# Altium PCB BackBoard.PcbDoc
Units mm, origin at the board's own origin, x right, y up, seen from the top; angles counter-clockwise.
Board outline 426 x 129 mm, 2 copper layers (Top Layer, Bottom Layer); 16 components, 23 nets, 1222 pads, 187 vias.
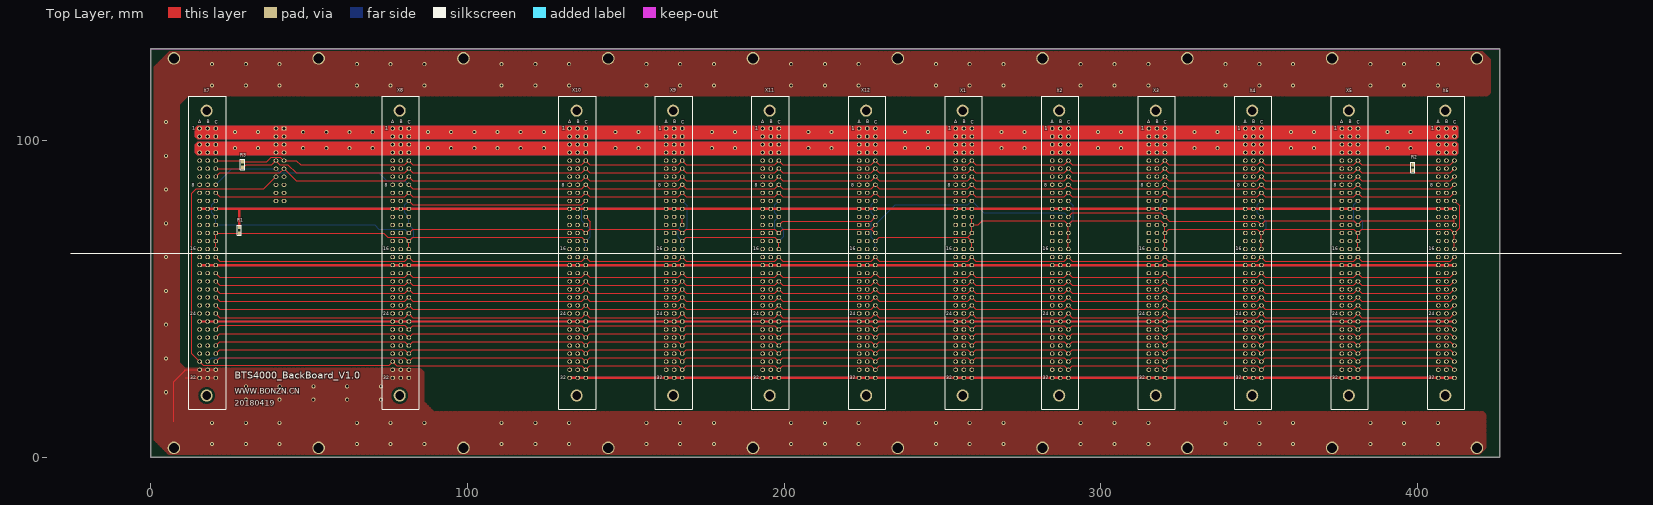
[diagram p0: Top Layer view]
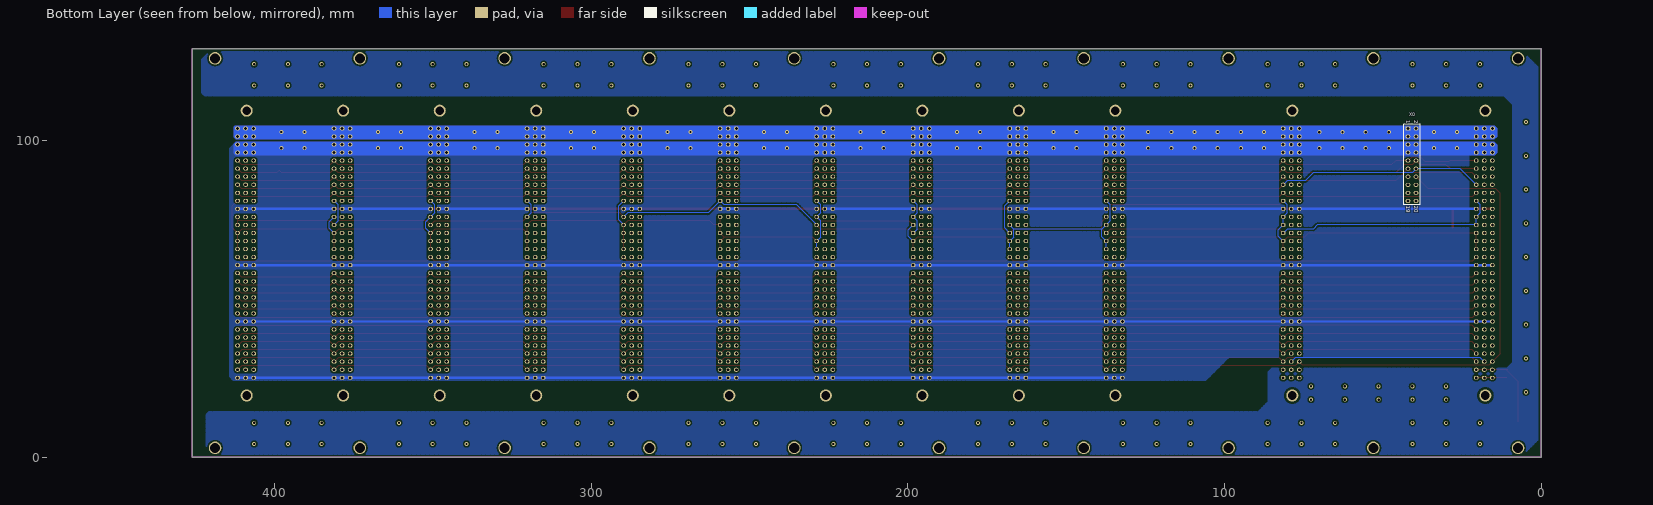
[diagram p1: Bottom Layer view, seen from below]
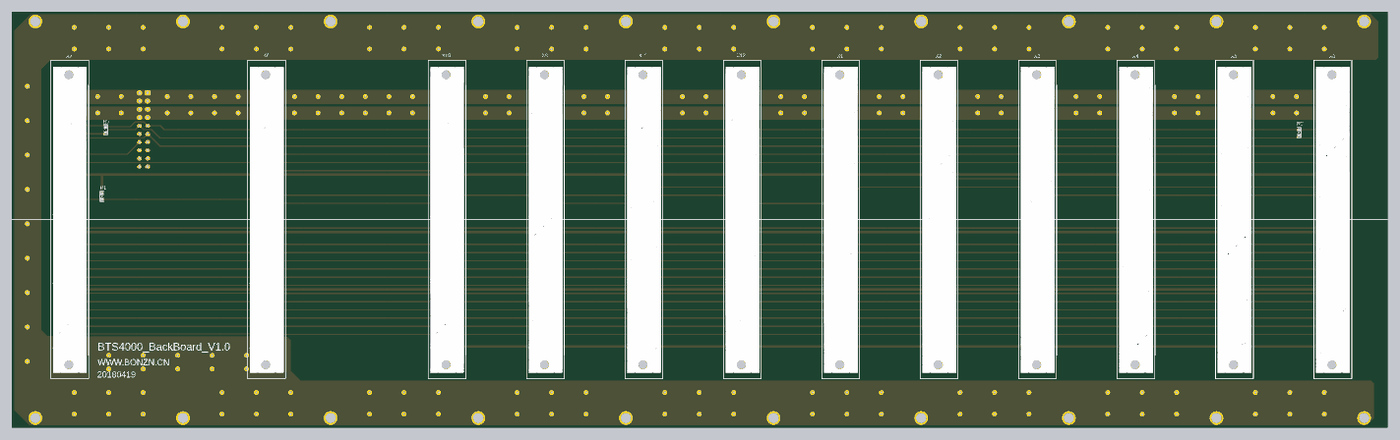
[diagram p2: 3D render of the assembled board from above, using the file's embedded part models]

## Layer stack, top to bottom
Top Layer: signal copper 0.0356
Dielectric: dielectric 0.32, FR-4, Dk 4.8
Bottom Layer: signal copper 0.0356

## Board outline
0,0 0,129 426,129 426,0

## Design rules (kind name [scope] priority, off if disabled: settings)
Clearance Clearance_1 [InPolygon] p1: gap=0.508
Clearance [All] p2: gap=0.305
HoleSize [All] p1: absolutevalues=TRUE maxlimit=254 minlimit=0.025 maxpercent=80.000 minpercent=20.000
PolygonConnect [All] p1: connectstyle=Direct reliefconductorwidth=0.254 reliefentries=4 polygonreliefangle="90 Angle" airgapwidth=0.254
RoomDefinition BackBoard [InComponentClass('BackBoard')] p1: confinementstyle=ConfineIn formatcopy=TRUE lockcomponents=FALSE outline -4.826,-8.031 433.959,-8.031 433.959,133.193 -4.826,133.193
RoutingVias [All] p1: holewidth=0.711 width=1.27 viastyle="Through Hole" minholewidth=0.711 minwidth=1.27 maxholewidth=0.711 maxwidth=1.27
SolderMaskExpansion [All] p1: expansion=0.102
Width [All] p1: maxlimit=254 minlimit=0.254 preferedwidth=0.381 minimp=50.000000 maximp=50.000000 favimp=50.000000
27 further rules are at their usual default settings.

## Components (designator, comment, footprint, x,y, rotation, side; value= is the part's Value field where it differs from the comment)
R1 "Res1" 0603_XF 27.94,71.725 r90 top
R2 "Res1" 0603_XF 398.526,91.537 r270 top
R3 "Res1" 0603_XF 28.956,92.465 r90 top
X0 "Header 10X2" HDR2X10 42.037,103.856 r270 bottom
X1 "CNVME96" CONNECT_96_Female 254.16,103.87 r0 top locked
X2 "CNVME96" CONNECT_96_Female 284.64,103.87 r0 top locked
X3 "CNVME96" CONNECT_96_Female 315.12,103.87 r0 top locked
X4 "CNVME96" CONNECT_96_Female 345.6,103.87 r0 top locked
X5 "CNVME96" CONNECT_96_Female 376.08,103.87 r0 top locked
X6 "CNVME96" CONNECT_96_Female 406.56,103.87 r0 top locked
X7 "CNVME96" CONNECT_96_Female 15.4,103.87 r0 top locked
X8 "CNVME96" CONNECT_96_Female 76.36,103.87 r0 top locked
X9 "CNVME96" CONNECT_96_Female 162.72,103.87 r0 top locked
X10 "CNVME96" CONNECT_96_Female 132.24,103.87 r0 top locked
X11 "CNVME96" CONNECT_96_Female 193.2,103.87 r0 top locked
X12 "CNVME96" CONNECT_96_Female 223.68,103.87 r0 top locked

## Footprints (in the part's own frame and the unit in brackets; to place one, negate y for a bottom-side part, rotate by r counter-clockwise, add the part's x,y. Pads: shape width x height; smd on the part's side, far side on the other; paste and mask are expansions set on the pad)
0603_XF [mm]
  rect 1.1x1 smd: 1(-0.889,0) 2(0.889,0)
  silkscreen extent -1.6,-0.66 1.6,0.66, body extent -0.85,-0.4 0.85,0.4, height 0.56
CONNECT_96_Female [mil]
  round 150 hole 106.3: 0(86.61,-3320.47) 0(86.61,220.47)
  oct 60x50 hole 37: A1(0,0)
  oval 60x50 hole 37: A2(0,-100) A3(0,-200) A4(0,-300) A5(0,-400) A6(0,-500) A7(0,-600) A8(0,-700) A9(0,-800) A10(0,-900) A11(0,-1000) A12(0,-1100) A13(0,-1200) A14(0,-1300) A15(0,-1400) A16(0,-1500) A17(0,-1600) A18(0,-1700) A19(0,-1800) A20(0,-1900) A21(0,-2000) A22(0,-2100) A23(0,-2200) A24(0,-2300) A25(0,-2400) A26(0,-2500) A27(0,-2600) A28(0,-2700) A29(0,-2800) A30(0,-2900) A31(0,-3000) A32(0,-3100) B1(100,0) B2(100,-100) B3(100,-200) B4(100,-300) B5(100,-400) B6(100,-500) B7(100,-600) B8(100,-700) B9(100,-800) B10(100,-900) B11(100,-1000) B12(100,-1100) B13(100,-1200) B14(100,-1300) B15(100,-1400) B16(100,-1500) B17(100,-1600) B18(100,-1700) B19(100,-1800) B20(100,-1900) B21(100,-2000) B22(100,-2100) B23(100,-2200) B24(100,-2300) B25(100,-2400) B26(100,-2500) B27(100,-2600) B28(100,-2700) B29(100,-2800) B30(100,-2900) B31(100,-3000) B32(100,-3100) C1(200,0) C2(200,-100) C3(200,-200) C4(200,-300) C5(200,-400) C6(200,-500) C7(200,-600) C8(200,-700) C9(200,-800) C10(200,-900) C11(200,-1000) C12(200,-1100) C13(200,-1200) C14(200,-1300) C15(200,-1400) C16(200,-1500) C17(200,-1600) C18(200,-1700) C19(200,-1800) C20(200,-1900) C21(200,-2000) C22(200,-2100) C23(200,-2200) C24(200,-2300) C25(200,-2400) C26(200,-2500) C27(200,-2600) C28(200,-2700) C29(200,-2800) C30(200,-2900) C31(200,-3000) C32(200,-3100)
  silkscreen extent -133,-3493 329,400, body extent -107,-3420 307,320, height 457
HDR2X10 [mm] "Connector; Header; 10x2 Position"
  rect 1.27x1.5 hole 0.9: 1(0,0)
  oval 1.27x1.5 hole 0.9: 2(0,2.54) 3(2.54,0) 4(2.54,2.54) 5(5.08,0) 6(5.08,2.54) 7(7.62,0) 8(7.62,2.54) 9(10.16,0) 10(10.16,2.54) 11(12.7,0) 12(12.7,2.54) 13(15.24,0) 14(15.24,2.54) 15(17.78,0) 16(17.78,2.54) 17(20.32,0) 18(20.32,2.54) 19(22.86,0) 20(22.86,2.54)
  silkscreen extent -1.27,-1.27 24.13,3.81

## Part data
R1 R2 R3: "Resistor"
X0: "Header, 10-Pin, Dual row"
X1 X2 X3 X4 X5 X6 X7 X8 X9 X10 X11 X12: "96-Pin Connector (3x32 2.54mm grid)"

## Free pads (board coordinates)
  round 4 hole 3.2: 0(7.26,3) 0(7.26,126) 0(52.98,3) 0(52.98,126) 0(98.7,3) 0(98.7,126) 0(144.42,3) 0(144.42,126) 0(190.14,3) 0(190.14,126) 0(235.86,3) 0(235.86,126) 0(281.58,3) 0(281.58,126) 0(327.3,3) 0(327.3,126) 0(373.02,3) 0(373.02,126) 0(418.74,3) 0(418.74,126)

## Via types
v1: diameter 1.27, hole 0.711, Top Layer to Bottom Layer, 187 vias

## Nets (pads, with @x,y where several pads share a name; then routed paths per layer and width w, separated by ;. In a path a pad name is that pad's centre, name@x,y a point inside that pad or via, vN(x,y) a via of type N, cw(c..) or ccw(c..) an arc to the next point about the centre after c; other vN are vias at no path point)
+5: X0.1 X0.2 X0.3 X0.4 X1.A1 X1.A2 X1.B1 X1.B2 X1.C1 X1.C2 X2.A1 X2.A2 X2.B1 X2.B2 X2.C1 X2.C2 X3.A1 X3.A2 X3.B1 X3.B2 X3.C1 X3.C2 X4.A1 X4.A2 X4.B1 X4.B2 X4.C1 X4.C2 X5.A1 X5.A2 X5.B1 X5.B2 X5.C1 X5.C2 X6.A1 X6.A2 X6.B1 X6.B2 X6.C1 X6.C2 X7.A1 X7.A2 X7.B1 X7.B2 X7.C1 X7.C2 X8.A1 X8.A2 X8.B1 X8.B2 X8.C1 X8.C2 X9.A1 X9.A2 X9.B1 X9.B2 X9.C1 X9.C2 X10.A1 X10.A2 X10.B1 X10.B2 X10.C1 X10.C2 X11.A1 X11.A2 X11.B1 X11.B2 X11.C1 X11.C2 X12.A1 X12.A2 X12.B1 X12.B2 X12.C1 X12.C2
  other v1: 48.1,102.699 55.415,102.699 62.73,102.699 70.046,102.699 26.543,102.713 33.858,102.713 87.503,102.713 94.818,102.713 102.133,102.713 109.449,102.713 116.764,102.713 124.079,102.713 146.66,102.713 153.975,102.713 177.14,102.713 184.455,102.713 207.62,102.713 214.935,102.713 238.1,102.713 245.415,102.713 268.58,102.713 275.895,102.713 299.06,102.713 306.375,102.713 329.54,102.713 336.855,102.713 360.02,102.713 367.335,102.713 390.5,102.713 397.815,102.713
CAN_H: R2.1 R3.2 X0.9 X1.C5 X2.C5 X3.C5 X4.C5 X5.C5 X6.C5 X7.C5 X8.C5 X9.C5 X10.C5 X11.C5 X12.C5 | length 404.1
  Top Layer w0.381: X7.C5 28.688,93.71 R3.2@28.956,93.442 ; R3.2 36.585,93.354 38.07,94.839 40.894,94.839 X0.9 45.974,93.696 47.244,92.426 80.156,92.426 X8.C5 82.724,92.426 136.036,92.426 X10.C5 138.604,92.426 166.516,92.426 X9.C5 169.084,92.426 196.996,92.426 X11.C5 199.564,92.426 227.476,92.426 X12.C5 230.044,92.426 257.956,92.426 X1.C5 260.524,92.426 288.436,92.426 X2.C5 291.004,92.426 318.916,92.426 X3.C5 321.484,92.426 349.396,92.426 X4.C5 351.964,92.426 379.876,92.426 X5.C5 382.444,92.426 410.356,92.426 X6.C5
CAN_L: R2.2 R3.1 X0.10 X1.C6 X2.C6 X3.C6 X4.C6 X5.C6 X6.C6 X7.C6 X8.C6 X9.C6 X10.C6 X11.C6 X12.C6 | length 405.6
  Top Layer w0.381: X7.C6 28.589,91.17 28.956,91.537 29.21,91.537 30.099,92.426 38.227,92.426 X0.10 40.728,92.465 43.268,92.465 45.847,89.886 80.156,89.886 X8.C6 82.724,89.886 136.036,89.886 X10.C6 138.604,89.886 166.516,89.886 X9.C6 169.084,89.886 196.996,89.886 X11.C6 199.564,89.886 227.476,89.886 X12.C6 230.044,89.886 257.956,89.886 X1.C6 260.524,89.886 288.436,89.886 X2.C6 291.004,89.886 318.916,89.886 X3.C6 321.484,89.886 349.396,89.886 X4.C6 351.964,89.886 379.876,89.886 X5.C6 382.444,89.886 397.764,89.886 R2.2 399.288,89.886 410.356,89.886 X6.C6
E1_PPS: X1.C30 X2.C30 X3.C30 X4.C30 X5.C30 X6.C30 X7.C30 X8.C30 X9.C30 X10.C30 X11.C30 X12.C30 | length 402.6
  Top Layer w0.381: X7.C30 21.736,31.466 80.184,31.466 X8.C30 82.696,31.466 136.064,31.466 X10.C30 138.576,31.466 166.544,31.466 X9.C30 169.056,31.466 197.024,31.466 X11.C30 199.536,31.466 227.504,31.466 X12.C30 230.016,31.466 257.984,31.466 X1.C30 260.496,31.466 288.464,31.466 X2.C30 290.976,31.466 318.944,31.466 X3.C30 321.456,31.466 349.424,31.466 X4.C30 351.936,31.466 379.904,31.466 X5.C30 382.416,31.466 410.384,31.466 X6.C30
Freq10M: X1.C9 X2.C9 X3.C9 X4.C9 X5.C9 X6.C9 X7.C9 X8.C9 X9.C9 X10.C9 X11.C9 X12.C9 | length 402.9
  Top Layer w0.381: X7.C9 21.764,82.266 80.156,82.266 X8.C9 82.724,82.266 136.036,82.266 X10.C9 138.604,82.266 166.516,82.266 X9.C9 169.084,82.266 196.996,82.266 X11.C9 199.564,82.266 227.476,82.266 X12.C9 230.044,82.266 257.956,82.266 X1.C9 260.524,82.266 288.436,82.266 X2.C9 291.004,82.266 318.916,82.266 X3.C9 321.484,82.266 349.396,82.266 X4.C9 351.964,82.266 379.876,82.266 X5.C9 382.444,82.266 410.356,82.266 X6.C9
GND: R1.2 X0.5 X0.6 X0.7 X0.8 X1.A3 X1.A4 X1.A11 X1.A18 X1.A25 X1.A32 X1.B3 X1.B4 X1.B11 X1.B18 X1.B25 X1.B32 X1.C3 X1.C4 X1.C11 X1.C18 X1.C25 X1.C32 X2.A3 X2.A4 X2.A11 X2.A18 X2.A25 X2.A32 X2.B3 X2.B4 X2.B11 X2.B18 X2.B25 X2.B32 X2.C3 X2.C4 X2.C11 X2.C18 X2.C25 X2.C32 X3.A3 X3.A4 X3.A11 X3.A18 X3.A25 X3.A32 X3.B3 X3.B4 X3.B11 X3.B18 X3.B25 X3.B32 X3.C3 X3.C4 X3.C11 X3.C18 X3.C25 X3.C32 X4.A3 X4.A4 X4.A11 X4.A18 X4.A25 X4.A32 X4.B3 X4.B4 X4.B11 X4.B18 X4.B25 X4.B32 X4.C3 X4.C4 X4.C11 X4.C18 X4.C25 X4.C32 X5.A3 X5.A4 X5.A11 X5.A18 X5.A25 X5.A32 X5.B3 X5.B4 X5.B11 X5.B18 X5.B25 X5.B32 X5.C3 X5.C4 X5.C11 X5.C18 X5.C25 X5.C32 X6.A3 X6.A4 X6.A11 X6.A18 X6.A25 X6.A32 X6.B3 X6.B4 X6.B11 X6.B18 X6.B25 X6.B32 X6.C3 X6.C4 X6.C11 X6.C18 X6.C25 X6.C32 X7.A3 X7.A4 X7.A11 X7.A18 X7.A25 X7.B3 X7.B4 X7.B11 X7.B18 X7.B25 X7.B30 X7.C3 X7.C4 X7.C11 X7.C18 X7.C25 X8.A3 X8.A4 X8.A11 X8.A18 X8.A25 X8.B3 X8.B4 X8.B11 X8.B18 X8.B25 X8.B30 X8.C3 X8.C4 X8.C11 X8.C18 X8.C25 X9.A3 X9.A4 X9.A11 X9.A18 X9.A25 X9.A32 X9.B3 X9.B4 X9.B11 X9.B18 X9.B25 X9.B32 X9.C3 X9.C4 X9.C11 X9.C18 X9.C25 X9.C32 X10.A3 X10.A4 X10.A11 X10.A18 X10.A25 X10.A32 X10.B3 X10.B4 X10.B11 X10.B18 X10.B25 X10.B32 X10.C3 X10.C4 X10.C11 X10.C18 X10.C25 X10.C32 X11.A3 X11.A4 X11.A11 X11.A18 X11.A25 X11.A32 X11.B3 X11.B4 X11.B11 X11.B18 X11.B25 X11.B32 X11.C3 X11.C4 X11.C11 X11.C18 X11.C25 X11.C32 X12.A3 X12.A4 X12.A11 X12.A18 X12.A25 X12.A32 X12.B3 X12.B4 X12.B11 X12.B18 X12.B25 X12.B32 X12.C3 X12.C4 X12.C11 X12.C18 X12.C25 X12.C32 | length 2877.1
  Top Layer w0.762: X7.A25 X7.B25 X7.C25 X8.A25 X8.B25 X8.C25 X10.A25 X10.B25 X10.C25 X9.A25 X9.B25 X9.C25 X11.A25 X11.B25 X11.C25 X12.A25 X12.B25 X12.C25 X1.A25 X1.B25 X1.C25 X2.A25 X2.B25 X2.C25 X3.A25 X3.B25 X3.C25 X4.A25 X4.B25 X4.C25 X5.A25 X5.B25 X5.C25 X6.A25 X6.B25 X6.C25 ; X7.A18 X7.B18 X7.C18 X8.A18 X8.B18 X8.C18 X10.A18 X10.B18 X10.C18 X9.A18 X9.B18 X9.C18 X11.A18 X11.B18 X11.C18 X12.A18 X12.B18 X12.C18 X1.A18 X1.B18 X1.C18 X2.A18 X2.B18 X2.C18 X3.A18 X3.B18 X3.C18 X4.A18 X4.B18 X4.C18 X5.A18 X5.B18 X5.C18 X6.A18 X6.B18 X6.C18 ; X7.A11 X7.B11 X7.C11 27.94,78.47 ; R1.2 27.94,78.47 ; X10.A32 X10.B32 X10.C32 X9.A32 X9.B32 X9.C32 X11.A32 X11.B32 X11.C32 X12.A32 X12.B32 X12.C32 X1.A32 X1.B32 X1.C32 X2.A32 X2.B32 X2.C32 X3.A32 X3.B32 X3.C32 X4.A32 X4.B32 X4.C32 X5.A32 X5.B32 X5.C32 X6.A32 X6.B32 X6.C32 ; X6.C11 X6.B11 X6.A11 X5.C11 X5.B11 X5.A11 X4.C11 X4.B11 X4.A11 X3.C11 X3.B11 X3.A11 X2.C11 X2.B11 X2.A11 X1.C11 X1.B11 X1.A11 X12.C11 X12.B11 X12.A11 X11.C11 X11.B11 X11.A11 X9.C11 X9.B11 X9.A11 X10.C11 X10.B11 X10.A11 X8.C11 X8.B11 X8.A11 27.94,78.47
  Bottom Layer w0.381: X7.B30 19.171,31.441 77.669,31.441 X8.B30
  Bottom Layer w0.762: X7.A25 X7.B25 X7.C25 X8.A25 X8.B25 X8.C25 X10.A25 X10.B25 X10.C25 X9.A25 X9.B25 X9.C25 X11.A25 X11.B25 X11.C25 X12.A25 X12.B25 X12.C25 X1.A25 X1.B25 X1.C25 X2.A25 X2.B25 X2.C25 X3.A25 X3.B25 X3.C25 X4.A25 X4.B25 X4.C25 X5.A25 X5.B25 X5.C25 X6.A25 X6.B25 X6.C25 ; X7.A18 X7.B18 X7.C18 X8.A18 X8.B18 X8.C18 X10.A18 X10.B18 X10.C18 X9.A18 X9.B18 X9.C18 X11.A18 X11.B18 X11.C18 X12.A18 X12.B18 X12.C18 X1.A18 X1.B18 X1.C18 X2.A18 X2.B18 X2.C18 X3.A18 X3.B18 X3.C18 X4.A18 X4.B18 X4.C18 X5.A18 X5.B18 X5.C18 X6.A18 X6.B18 X6.C18 ; X7.C11 X8.A11 X8.B11 ; X8.C11 X10.A11 X10.B11 ; X10.A32 X10.B32 X10.C32 X9.A32 X9.B32 X9.C32 X11.A32 X11.B32 X11.C32 X12.A32 X12.B32 X12.C32 X1.A32 X1.B32 X1.C32 X2.A32 X2.B32 X2.C32 X3.A32 X3.B32 X3.C32 X4.A32 X4.B32 X4.C32 X5.A32 X5.B32 X5.C32 X6.A32 X6.B32 X6.C32 ; X10.C11 X9.A11 X9.B11 ; X11.A11 X11.B11 ; X11.C11 X12.A11 X12.B11 ; X1.A11 X1.B11 X1.C11 ; X2.A11 X2.B11 X2.C11 ; X3.A11 X3.B11 ; X3.C11 X4.A11 X4.B11 ; X4.C11 X5.A11 X5.B11 ; X5.C11 X6.A11 X6.B11 X6.C11
  other v1: 48.1,97.619 55.415,97.619 62.73,97.619 70.046,97.619 26.543,97.633 33.858,97.633 87.503,97.633 94.818,97.633 102.133,97.633 109.449,97.633 116.764,97.633 124.079,97.633 146.66,97.633 153.975,97.633 177.14,97.633 184.455,97.633 207.62,97.633 214.935,97.633 238.1,97.633 245.415,97.633 268.58,97.633 275.895,97.633 299.06,97.633 306.375,97.633 329.54,97.633 336.855,97.633 360.02,97.633 367.335,97.633 390.5,97.633 397.815,97.633
H: X1.C10 X2.C12 X3.C10 X3.C12 X4.C13 X5.C10 X5.C13 X6.C12 X6.C13 X7.C10 X7.C12 X7.C13 X8.C14 X9.C10 X9.C14 X10.C12 X10.C14 X11.C10 X11.C12 X11.C14 X12.C13 X12.C14 | length 461.3
  Top Layer w0.381: X8.C14 82.696,72.106 136.064,72.106 X10.C14 138.576,72.106 138.811,72.106 ; X10.C12 138.811,74.439 138.811,72.106 ; X12.C14 227.504,72.106 ; X12.C13@228.76,73.362 227.504,72.106 ; X2.C12 290.976,77.186 318.944,77.186 X3.C12 321.533,74.597 349.473,74.597 X4.C13 351.936,74.646 379.904,74.646 X5.C13 382.416,74.646 411.64,74.646 ; X6.C13 411.64,74.646 ; X6.C12 411.64,74.646 ; 138.811,72.106 166.544,72.106 X9.C14 169.056,72.106 197.024,72.106 X11.C14 199.536,72.106 227.504,72.106
  Bottom Layer w0.381: X7.C10 19.202,79.732 19.202,77.208 X7.C12 X7.C13 70.725,73.39 72.009,72.106 80.184,72.106 X8.C14 ; X9.C14 169.418,72.468 169.418,79.392 X9.C10 ; X11.C14 197.023,72.107 197.023,74.673 X11.C12 197.023,77.187 197.023,79.753 X11.C10 ; X12.C13 235.096,79.726 257.956,79.726 X1.C10 263.064,77.186 288.464,77.186 X2.C12 ; X3.C12 318.93,77.2 318.93,79.74 X3.C10 ; X5.C13 379.89,74.66 379.89,79.74 X5.C10
IRIG-B-OUT0: X1.C17 X2.C17 X3.C17 X4.C17 X5.C17 X6.C17 X7.C17 X8.C17 X9.C17 X10.C17 X11.C17 X12.C17 | length 402.9
  Top Layer w0.381: X7.C17 21.764,61.946 80.156,61.946 X8.C17 82.724,61.946 136.036,61.946 X10.C17 138.604,61.946 166.516,61.946 X9.C17 169.084,61.946 196.996,61.946 X11.C17 199.564,61.946 227.476,61.946 X12.C17 230.044,61.946 257.956,61.946 X1.C17 260.524,61.946 288.436,61.946 X2.C17 291.004,61.946 318.916,61.946 X3.C17 321.484,61.946 349.396,61.946 X4.C17 351.964,61.946 379.876,61.946 X5.C17 382.444,61.946 410.356,61.946 X6.C17
IRIG-B-OUT1: X1.C19 X2.C19 X3.C19 X4.C19 X5.C19 X6.C19 X7.C19 X8.C19 X9.C19 X10.C19 X11.C19 X12.C19 | length 402.9
  Top Layer w0.381: X7.C19 21.764,56.866 80.156,56.866 X8.C19 82.724,56.866 136.036,56.866 X10.C19 138.604,56.866 166.516,56.866 X9.C19 169.084,56.866 196.996,56.866 X11.C19 199.564,56.866 227.476,56.866 X12.C19 230.044,56.866 257.956,56.866 X1.C19 260.524,56.866 288.436,56.866 X2.C19 291.004,56.866 318.916,56.866 X3.C19 321.484,56.866 349.396,56.866 X4.C19 351.964,56.866 379.876,56.866 X5.C19 382.444,56.866 410.356,56.866 X6.C19
IRIG-B-OUT2: X1.C20 X2.C20 X3.C20 X4.C20 X5.C20 X6.C20 X7.C20 X8.C20 X9.C20 X10.C20 X11.C20 X12.C20 | length 402.9
  Top Layer w0.381: X7.C20 21.764,54.326 80.156,54.326 X8.C20 82.724,54.326 136.036,54.326 X10.C20 138.604,54.326 166.516,54.326 X9.C20 169.084,54.326 196.996,54.326 X11.C20 199.564,54.326 227.476,54.326 X12.C20 230.044,54.326 257.956,54.326 X1.C20 260.524,54.326 288.436,54.326 X2.C20 291.004,54.326 318.916,54.326 X3.C20 321.484,54.326 349.396,54.326 X4.C20 351.964,54.326 379.876,54.326 X5.C20 382.444,54.326 410.356,54.326 X6.C20
IRIG-B-OUT3: X1.C21 X2.C21 X3.C21 X4.C21 X5.C21 X6.C21 X7.C21 X8.C21 X9.C21 X10.C21 X11.C21 X12.C21 | length 402.9
  Top Layer w0.381: X7.C21 21.764,51.786 80.156,51.786 X8.C21 82.724,51.786 136.036,51.786 X10.C21 138.604,51.786 166.516,51.786 X9.C21 169.084,51.786 196.996,51.786 X11.C21 199.564,51.786 227.476,51.786 X12.C21 230.044,51.786 257.956,51.786 X1.C21 260.524,51.786 288.436,51.786 X2.C21 291.004,51.786 318.916,51.786 X3.C21 321.484,51.786 349.396,51.786 X4.C21 351.964,51.786 379.876,51.786 X5.C21 382.444,51.786 410.356,51.786 X6.C21
L: R1.1 X1.C12 X1.C13 X1.C14 X1.C15 X1.C16 X2.C10 X2.C13 X2.C14 X2.C15 X2.C16 X3.C13 X3.C14 X3.C15 X3.C16 X4.C10 X4.C12 X4.C14 X4.C15 X4.C16 X5.C12 X5.C14 X5.C15 X5.C16 X6.C10 X6.C14 X6.C15 X6.C16 X7.C14 X7.C15 X7.C16 X8.C10 X8.C12 X8.C13 X8.C15 X8.C16 X9.C12 X9.C13 X9.C15 X9.C16 X10.C10 X10.C13 X10.C15 X10.C16 X11.C13 X11.C15 X11.C16 X12.C10 X12.C12 X12.C15 X12.C16 | length 612.4
  Top Layer w0.381: X7.C16 X7.C15 X7.C14 R1.1@27.926,70.85 ; R1.1 73.533,70.836 74.803,69.566 80.184,69.566 X8.C15 ; X8.C16 X8.C15 ; X8.C10 82.724,79.726 136.036,79.726 X10.C10 ; X10.C15 136.064,69.566 82.696,69.566 X8.C15 ; X9.C15 169.056,69.566 197.024,69.566 X11.C15 X11.C16 ; X9.C13 X9.C12 ; X11.C13 199.486,74.597 227.426,74.597 X12.C12 ; X12.C15 229.966,69.517 257.906,69.517 ; X1.C15@259.113,68.31 257.906,69.517 ; X1.C16 X1.C15 ; X1.C12 X1.C13 ; X2.C16 X2.C15 X2.C14 X2.C13 ; X3.C16 X3.C15 X3.C14 ; X4.C16 X4.C15 X4.C14 ; X5.C16 X5.C15 X5.C14 ; X6.C16 X6.C15 X6.C14 ; X6.C10 413.258,79.392 413.258,72.468 X6.C14 ; 257.906,69.517 X1.C14 X1.C13 ; X1.C13 261.253,73.39 262.509,74.646 288.464,74.646 X2.C13 ; X2.C13 290.976,74.646 318.944,74.646 X3.C13 X3.C14 ; X3.C14 321.456,72.106 349.424,72.106 X4.C14 ; X4.C14 351.936,72.106 379.904,72.106 X5.C14 ; X5.C14 382.416,72.106 410.384,72.106 X6.C14
  Bottom Layer w0.381: X8.C15 82.947,69.817 82.947,71.883 X8.C13 X8.C12 80.17,77.2 80.17,79.74 X8.C10 ; X10.C16 X10.C15 138.684,69.674 138.684,72.026 X10.C13 136.05,74.66 136.05,79.74 X10.C10 ; 138.684,72.106 165.278,72.106 166.516,72.106 ; X9.C16 X9.C15 166.53,69.58 166.53,72.092 166.516,72.106 ; X9.C13 166.516,72.106 ; X11.C15 199.771,69.801 199.771,71.899 X11.C13 ; X12.C16 X12.C15 227.49,69.58 227.49,74.66 X12.C12 227.477,77.213 227.477,79.727 X12.C10 ; X2.C13 291.338,75.008 291.338,79.392 X2.C10 ; X4.C14 352.171,72.341 352.171,74.439 X4.C12 349.41,77.2 349.41,79.74 X4.C10 ; X5.C14 382.651,72.341 382.651,74.439 X5.C12
n_RESET: X0.14 X2.C31 X3.C31 X4.C31 X5.C31 X6.C31 X7.A30 X8.A30 X9.C31 X10.C31 X11.C31 X12.C31 | length 489.5
  Top Layer w0.381: X0.14 35.687,84.806 14.351,84.806 12.954,83.409 12.954,32.656 X7.A30 16.557,29.053 75.203,29.053 X8.A30 77.644,28.926 136.064,28.926 X10.C31 138.576,28.926 166.544,28.926 X9.C31 169.056,28.926 197.024,28.926 X11.C31 199.536,28.926 227.504,28.926 X12.C31 230.016,28.926 288.464,28.926 X2.C31 290.976,28.926 318.944,28.926 X3.C31 321.456,28.926 349.424,28.926 X4.C31 351.936,28.926 379.904,28.926 X5.C31 382.416,28.926 410.384,28.926 X6.C31
PE: pad.0 X7.A31 X7.A32 X7.B31 X7.B32 X7.C31 X7.C32 X8.A31 X8.A32 X8.B31 X8.B32 X8.C31 X8.C32 | length 37.6
  Top Layer w0.381: 7.26,11.225 7.26,23.867 11.063,27.67 ; 10.552,27.67 11.063,27.67 ; 10.781,25.13 X7.A32 X7.B32 X7.C32 ; X7.C31 X7.B31 X7.A31 11.063,27.67
  other v1: 19.304,4.212 29.972,4.212 40.64,4.212 65.024,4.212 75.692,4.212 86.36,4.212 110.744,4.212 121.412,4.212 132.08,4.212 156.464,4.212 167.132,4.212 177.8,4.212 202.184,4.212 212.852,4.212 223.52,4.212 247.904,4.212 258.572,4.212 269.24,4.212 293.624,4.212 304.292,4.212 314.96,4.212 339.344,4.212 350.012,4.212 360.68,4.212 385.064,4.212 395.732,4.212 406.4,4.212 19.304,10.917 29.972,10.917 40.64,10.917 65.024,10.917 75.692,10.917 86.36,10.917 110.744,10.917 121.412,10.917 132.08,10.917 156.464,10.917 167.132,10.917 177.8,10.917 202.184,10.917 212.852,10.917 223.52,10.917 247.904,10.917 258.572,10.917 269.24,10.917 293.624,10.917 304.292,10.917 314.96,10.917 339.344,10.917 350.012,10.917 360.68,10.917 385.064,10.917 395.732,10.917 406.4,10.917 29.972,18.233 40.64,18.233 51.308,18.233 61.976,18.233 72.644,18.233 4.772,20.565 29.997,22.449 40.665,22.449 51.333,22.449 62.001,22.449 72.669,22.449 4.772,31.233 4.772,41.901 4.772,52.569 4.772,63.237 4.772,73.905 4.772,84.573 4.772,95.241 4.772,105.909 19.304,117.467 29.972,117.467 40.64,117.467 65.024,117.467 75.692,117.467 86.36,117.467 110.744,117.467 121.412,117.467 132.08,117.467 156.464,117.467 167.132,117.467 177.8,117.467 202.184,117.467 212.852,117.467 223.52,117.467 247.904,117.467 258.572,117.467 269.24,117.467 293.624,117.467 304.292,117.467 314.96,117.467 339.344,117.467 350.012,117.467 360.68,117.467 385.064,117.467 395.732,117.467 406.4,117.467 19.304,124.173 29.972,124.173 40.64,124.173 65.024,124.173 75.692,124.173 86.36,124.173 110.744,124.173 121.412,124.173 132.08,124.173 156.464,124.173 167.132,124.173 177.8,124.173 202.184,124.173 212.852,124.173 223.52,124.173 247.904,124.173 258.572,124.173 269.24,124.173 293.624,124.173 304.292,124.173 314.96,124.173 339.344,124.173 350.012,124.173 360.68,124.173 385.064,124.173 395.732,124.173 406.4,124.173
PPS: X0.12 X1.C8 X2.C8 X3.C8 X4.C8 X5.C8 X6.C8 X7.C8 X8.C8 X9.C8 X10.C8 X11.C8 X12.C8 | length 406
  Top Layer w0.381: X8.C8 82.724,84.806 136.036,84.806 X10.C8 138.604,84.806 166.516,84.806 X9.C8 169.084,84.806 196.996,84.806 X11.C8 199.564,84.806 227.476,84.806 X12.C8 230.044,84.806 257.956,84.806 X1.C8 260.524,84.806 288.436,84.806 X2.C8 291.004,84.806 318.916,84.806 X3.C8 321.484,84.806 349.396,84.806 X4.C8 351.964,84.806 379.876,84.806 X5.C8 382.444,84.806 410.356,84.806 X6.C8
  Bottom Layer w0.381: X7.C8 25.546,91.156 X0.12 40.767,89.886 72.009,89.886 74.549,87.346 80.184,87.346 X8.C8
PTPI_PPS: X1.C24 X2.C24 X3.C24 X4.C24 X5.C24 X6.C24 X7.C24 X8.C24 X9.C24 X10.C24 X11.C24 X12.C24 | length 402.9
  Top Layer w0.381: X7.C24 21.764,44.166 80.156,44.166 X8.C24 82.724,44.166 136.036,44.166 X10.C24 138.604,44.166 166.516,44.166 X9.C24 169.084,44.166 196.996,44.166 X11.C24 199.564,44.166 227.476,44.166 X12.C24 230.044,44.166 257.956,44.166 X1.C24 260.524,44.166 288.436,44.166 X2.C24 291.004,44.166 318.916,44.166 X3.C24 321.484,44.166 349.396,44.166 X4.C24 351.964,44.166 379.876,44.166 X5.C24 382.444,44.166 410.356,44.166 X6.C24
RXD_E1: X1.C28 X2.C28 X3.C28 X4.C28 X5.C28 X6.C28 X7.C28 X8.C28 X9.C28 X10.C28 X11.C28 X12.C28 | length 402.6
  Top Layer w0.381: X7.C28 21.736,36.546 80.184,36.546 X8.C28 82.696,36.546 136.064,36.546 X10.C28 138.576,36.546 166.544,36.546 X9.C28 169.056,36.546 197.024,36.546 X11.C28 199.536,36.546 227.504,36.546 X12.C28 230.016,36.546 257.984,36.546 X1.C28 260.496,36.546 288.464,36.546 X2.C28 290.976,36.546 318.944,36.546 X3.C28 321.456,36.546 349.424,36.546 X4.C28 351.936,36.546 379.904,36.546 X5.C28 382.416,36.546 410.384,36.546 X6.C28
RXD_PTPI: X1.C22 X2.C22 X3.C22 X4.C22 X5.C22 X6.C22 X7.C22 X8.C22 X9.C22 X10.C22 X11.C22 X12.C22 | length 402.9
  Top Layer w0.381: X7.C22 21.764,49.246 80.156,49.246 X8.C22 82.724,49.246 136.036,49.246 X10.C22 138.604,49.246 166.516,49.246 X9.C22 169.084,49.246 196.996,49.246 X11.C22 199.564,49.246 227.476,49.246 X12.C22 230.044,49.246 257.956,49.246 X1.C22 260.524,49.246 288.436,49.246 X2.C22 291.004,49.246 318.916,49.246 X3.C22 321.484,49.246 349.396,49.246 X4.C22 351.964,49.246 379.876,49.246 X5.C22 382.444,49.246 410.356,49.246 X6.C22
RXD_PTPO: X1.C26 X2.C26 X3.C26 X4.C26 X5.C26 X6.C26 X7.C26 X8.C26 X9.C26 X10.C26 X11.C26 X12.C26 | length 402.7
  Top Layer w0.381: X7.C26 21.813,41.704 80.106,41.704 X8.C26 82.696,41.626 136.064,41.626 X10.C26 138.576,41.626 166.544,41.626 X9.C26 169.056,41.626 197.024,41.626 X11.C26 199.536,41.626 227.504,41.626 X12.C26 230.016,41.626 257.984,41.626 X1.C26 260.496,41.626 288.464,41.626 X2.C26 290.976,41.626 318.944,41.626 X3.C26 321.456,41.626 349.424,41.626 X4.C26 351.936,41.626 379.904,41.626 X5.C26 382.416,41.626 410.384,41.626 X6.C26
TOD: X0.11 X1.C7 X2.C7 X3.C7 X4.C7 X5.C7 X6.C7 X7.C7 X8.C7 X9.C7 X10.C7 X11.C7 X12.C7 | length 405
  Top Layer w0.381: X7.C7 21.736,89.886 40.767,89.886 X0.11 45.847,87.346 80.156,87.346 X8.C7 82.724,87.346 136.036,87.346 X10.C7 138.604,87.346 166.516,87.346 X9.C7 169.084,87.346 196.996,87.346 X11.C7 199.564,87.346 227.476,87.346 X12.C7 230.044,87.346 257.956,87.346 X1.C7 260.524,87.346 288.436,87.346 X2.C7 291.004,87.346 318.916,87.346 X3.C7 321.484,87.346 349.396,87.346 X4.C7 351.964,87.346 379.876,87.346 X5.C7 382.444,87.346 410.356,87.346 X6.C7
TXD_E1: X1.C29 X2.C29 X3.C29 X4.C29 X5.C29 X6.C29 X7.C29 X8.C29 X9.C29 X10.C29 X11.C29 X12.C29 | length 402.6
  Top Layer w0.381: X7.C29 21.736,34.006 80.184,34.006 X8.C29 82.696,34.006 136.064,34.006 X10.C29 138.576,34.006 166.544,34.006 X9.C29 169.056,34.006 197.024,34.006 X11.C29 199.536,34.006 227.504,34.006 X12.C29 230.016,34.006 257.984,34.006 X1.C29 260.496,34.006 288.464,34.006 X2.C29 290.976,34.006 318.944,34.006 X3.C29 321.456,34.006 349.424,34.006 X4.C29 351.936,34.006 379.904,34.006 X5.C29 382.416,34.006 410.384,34.006 X6.C29
TXD_PTPI: X1.C23 X2.C23 X3.C23 X4.C23 X5.C23 X6.C23 X7.C23 X8.C23 X9.C23 X10.C23 X11.C23 X12.C23 | length 402.9
  Top Layer w0.381: X7.C23 21.764,46.706 80.156,46.706 X8.C23 82.724,46.706 136.036,46.706 X10.C23 138.604,46.706 166.516,46.706 X9.C23 169.084,46.706 196.996,46.706 X11.C23 199.564,46.706 227.476,46.706 X12.C23 230.044,46.706 257.956,46.706 X1.C23 260.524,46.706 288.436,46.706 X2.C23 291.004,46.706 318.916,46.706 X3.C23 321.484,46.706 349.396,46.706 X4.C23 351.964,46.706 379.876,46.706 X5.C23 382.444,46.706 410.356,46.706 X6.C23
TXD_PTPO: X1.C27 X2.C27 X3.C27 X4.C27 X5.C27 X6.C27 X7.C27 X8.C27 X9.C27 X10.C27 X11.C27 X12.C27 | length 402.6
  Top Layer w0.381: X7.C27 21.736,39.086 80.184,39.086 X8.C27 82.696,39.086 136.064,39.086 X10.C27 138.576,39.086 166.544,39.086 X9.C27 169.056,39.086 197.024,39.086 X11.C27 199.536,39.086 227.504,39.086 X12.C27 230.016,39.086 257.984,39.086 X1.C27 260.496,39.086 288.464,39.086 X2.C27 290.976,39.086 318.944,39.086 X3.C27 321.456,39.086 349.424,39.086 X4.C27 351.936,39.086 379.904,39.086 X5.C27 382.416,39.086 410.384,39.086 X6.C27
pads on no net: X0.13 X0.15 X0.16 X0.17 X0.18 X0.19 X0.20 X1.0 X1.A5 X1.A6 X1.A7 X1.A8 X1.A9 X1.A10 X1.A12 X1.A13 X1.A14 X1.A15 X1.A16 X1.A17 X1.A19 X1.A20 X1.A21 X1.A22 X1.A23 X1.A24 X1.A26 X1.A27 X1.A28 X1.A29 X1.A30 X1.A31 X1.B5 X1.B6 X1.B7 X1.B8 X1.B9 X1.B10 X1.B12 X1.B13 X1.B14 X1.B15 X1.B16 X1.B17 X1.B19 X1.B20 X1.B21 X1.B22 X1.B23 X1.B24 X1.B26 X1.B27 X1.B28 X1.B29 X1.B30 X1.B31 X1.C31 X2.0 X2.A5 X2.A6 X2.A7 X2.A8 X2.A9 X2.A10 X2.A12 X2.A13 X2.A14 X2.A15 X2.A16 X2.A17 X2.A19 X2.A20 X2.A21 X2.A22 X2.A23 X2.A24 X2.A26 X2.A27 X2.A28 X2.A29 X2.A30 X2.A31 X2.B5 X2.B6 X2.B7 X2.B8 X2.B9 X2.B10 X2.B12 X2.B13 X2.B14 X2.B15 X2.B16 X2.B17 X2.B19 X2.B20 X2.B21 X2.B22 X2.B23 X2.B24 X2.B26 X2.B27 X2.B28 X2.B29 X2.B30 X2.B31 X3.0 X3.A5 X3.A6 X3.A7 X3.A8 X3.A9 X3.A10 X3.A12 X3.A13 X3.A14 X3.A15 X3.A16 X3.A17 X3.A19 X3.A20 X3.A21 X3.A22 X3.A23 X3.A24 X3.A26 X3.A27 X3.A28 X3.A29 X3.A30 X3.A31 X3.B5 X3.B6 X3.B7 X3.B8 X3.B9 X3.B10 X3.B12 X3.B13 X3.B14 X3.B15 X3.B16 X3.B17 X3.B19 X3.B20 X3.B21 X3.B22 X3.B23 X3.B24 X3.B26 X3.B27 X3.B28 X3.B29 X3.B30 X3.B31 X4.0 X4.A5 X4.A6 X4.A7 X4.A8 X4.A9 X4.A10 X4.A12 X4.A13 X4.A14 X4.A15 X4.A16 X4.A17 X4.A19 X4.A20 X4.A21 X4.A22 X4.A23 X4.A24 X4.A26 X4.A27 X4.A28 X4.A29 X4.A30 X4.A31 X4.B5 X4.B6 X4.B7 X4.B8 X4.B9 X4.B10 X4.B12 X4.B13 X4.B14 X4.B15 X4.B16 X4.B17 X4.B19 X4.B20 X4.B21 X4.B22 X4.B23 X4.B24 X4.B26 X4.B27 X4.B28 X4.B29 X4.B30 X4.B31 X5.0 X5.A5 X5.A6 X5.A7 X5.A8 X5.A9 X5.A10 X5.A12 X5.A13 X5.A14 X5.A15 X5.A16 X5.A17 X5.A19 X5.A20 X5.A21 X5.A22 X5.A23 X5.A24 X5.A26 X5.A27 X5.A28 X5.A29 X5.A30 X5.A31 X5.B5 X5.B6 X5.B7 X5.B8 X5.B9 X5.B10 X5.B12 X5.B13 X5.B14 X5.B15 X5.B16 X5.B17 X5.B19 X5.B20 X5.B21 X5.B22 X5.B23 X5.B24 X5.B26 X5.B27 X5.B28 X5.B29 X5.B30 X5.B31 X6.0 X6.A5 X6.A6 X6.A7 X6.A8 X6.A9 X6.A10 X6.A12 X6.A13 X6.A14 X6.A15 X6.A16 X6.A17 X6.A19 X6.A20 X6.A21 X6.A22 X6.A23 X6.A24 X6.A26 X6.A27 X6.A28 X6.A29 X6.A30 X6.A31 X6.B5 X6.B6 X6.B7 X6.B8 X6.B9 X6.B10 X6.B12 X6.B13 X6.B14 X6.B15 X6.B16 X6.B17 X6.B19 X6.B20 X6.B21 X6.B22 X6.B23 X6.B24 X6.B26 X6.B27 X6.B28 X6.B29 X6.B30 X6.B31 X7.0 X7.A5 X7.A6 X7.A7 X7.A8 X7.A9 X7.A10 X7.A12 X7.A13 X7.A14 X7.A15 X7.A16 X7.A17 X7.A19 X7.A20 X7.A21 X7.A22 X7.A23 X7.A24 X7.A26 X7.A27 X7.A28 X7.A29 X7.B5 X7.B6 X7.B7 X7.B8 X7.B9 X7.B10 X7.B12 X7.B13 X7.B14 X7.B15 X7.B16 X7.B17 X7.B19 X7.B20 X7.B21 X7.B22 X7.B23 X7.B24 X7.B26 X7.B27 X7.B28 X7.B29 X8.0 X8.A5 X8.A6 X8.A7 X8.A8 X8.A9 X8.A10 X8.A12 X8.A13 X8.A14 X8.A15 X8.A16 X8.A17 X8.A19 X8.A20 X8.A21 X8.A22 X8.A23 X8.A24 X8.A26 X8.A27 X8.A28 X8.A29 X8.B5 X8.B6 X8.B7 X8.B8 X8.B9 X8.B10 X8.B12 X8.B13 X8.B14 X8.B15 X8.B16 X8.B17 X8.B19 X8.B20 X8.B21 X8.B22 X8.B23 X8.B24 X8.B26 X8.B27 X8.B28 X8.B29 X9.0 X9.A5 X9.A6 X9.A7 X9.A8 X9.A9 X9.A10 X9.A12 X9.A13 X9.A14 X9.A15 X9.A16 X9.A17 X9.A19 X9.A20 X9.A21 X9.A22 X9.A23 X9.A24 X9.A26 X9.A27 X9.A28 X9.A29 X9.A30 X9.A31 X9.B5 X9.B6 X9.B7 X9.B8 X9.B9 X9.B10 X9.B12 X9.B13 X9.B14 X9.B15 X9.B16 X9.B17 X9.B19 X9.B20 X9.B21 X9.B22 X9.B23 X9.B24 X9.B26 X9.B27 X9.B28 X9.B29 X9.B30 X9.B31 X10.0 X10.A5 X10.A6 X10.A7 X10.A8 X10.A9 X10.A10 X10.A12 X10.A13 X10.A14 X10.A15 X10.A16 X10.A17 X10.A19 X10.A20 X10.A21 X10.A22 X10.A23 X10.A24 X10.A26 X10.A27 X10.A28 X10.A29 X10.A30 X10.A31 X10.B5 X10.B6 X10.B7 X10.B8 X10.B9 X10.B10 X10.B12 X10.B13 X10.B14 X10.B15 X10.B16 X10.B17 X10.B19 X10.B20 X10.B21 X10.B22 X10.B23 X10.B24 X10.B26 X10.B27 X10.B28 X10.B29 X10.B30 X10.B31 X11.0 X11.A5 X11.A6 X11.A7 X11.A8 X11.A9 X11.A10 X11.A12 X11.A13 X11.A14 X11.A15 X11.A16 X11.A17 X11.A19 X11.A20 X11.A21 X11.A22 X11.A23 X11.A24 X11.A26 X11.A27 X11.A28 X11.A29 X11.A30 X11.A31 X11.B5 X11.B6 X11.B7 X11.B8 X11.B9 X11.B10 X11.B12 X11.B13 X11.B14 X11.B15 X11.B16 X11.B17 X11.B19 X11.B20 X11.B21 X11.B22 X11.B23 X11.B24 X11.B26 X11.B27 X11.B28 X11.B29 X11.B30 X11.B31 X12.0 X12.A5 X12.A6 X12.A7 X12.A8 X12.A9 X12.A10 X12.A12 X12.A13 X12.A14 X12.A15 X12.A16 X12.A17 X12.A19 X12.A20 X12.A21 X12.A22 X12.A23 X12.A24 X12.A26 X12.A27 X12.A28 X12.A29 X12.A30 X12.A31 X12.B5 X12.B6 X12.B7 X12.B8 X12.B9 X12.B10 X12.B12 X12.B13 X12.B14 X12.B15 X12.B16 X12.B17 X12.B19 X12.B20 X12.B21 X12.B22 X12.B23 X12.B24 X12.B26 X12.B27 X12.B28 X12.B29 X12.B30 X12.B31

## Polygon pours and split planes (outlines as drawn)
GND on Bottom Layer "Top Layer-No Net" (hatched 90Degree grid 0.203 track 0.508, remove dead copper, pour order 6): 14.097,96.744 21.336,96.744 22.885,95.195 22.885,31.593 98.679,31.593 105.918,24.354 413.004,24.354 414.147,25.497 414.147,97.506 412.242,99.411 14.808,99.411 14.097,98.7
no net on Bottom Layer "Top Layer-No Net" (hatched 90Degree grid 0.203 track 0.508, remove dead copper, pour order 5): 1.023,5.581 5.588,1.016 419.608,1.016 421.513,2.921 421.513,13.559 420.751,14.321 89.408,14.321 86.106,17.623 86.106,27.021 84.963,28.164 10.795,28.164 8.89,30.069 8.89,111.349 11.811,114.27 422.148,114.27 422.91,115.032 422.91,125.73 420.624,128.016 5.817,128.016 1.016,123.215 1.016,61.976
PE on Top Layer "Top Layer-No Net" (hatched 90Degree grid 0.203 track 0.508, remove dead copper, pour order 4): 1.023,5.581 5.588,1.016 419.608,1.016 421.513,2.921 421.513,13.559 420.751,14.321 89.408,14.321 86.106,17.623 86.106,27.021 84.963,28.164 10.795,28.164 8.89,30.069 8.89,111.349 11.811,114.27 422.148,114.27 422.91,115.032 422.91,125.73 420.624,128.016 5.817,128.016 1.016,123.215 1.016,61.976

## Keep-outs
Keep-Out Layer:
  the board outline again, w0.254

## Other copper
Top Layer:
  region net +5: 14.605,104.745 412.496,104.745 412.877,104.364 412.877,101.062 412.242,100.427 14.732,100.427 13.843,101.316 13.843,103.983
  region net GND: 14.732,99.665 412.242,99.665 412.877,99.03 412.877,95.982 412.369,95.474 14.605,95.474 13.843,96.236 13.843,98.776
  pour cut-out: 78.56,16.63 cw(c78.56,19.53) 75.66,19.53 cw(c78.56,19.53) 78.56,22.43 cw(c78.56,19.53) 81.46,19.53 cw(c78.56,19.53)
  pour cut-out: 17.6,16.63 cw(c17.6,19.53) 14.7,19.53 cw(c17.6,19.53) 17.6,22.43 cw(c17.6,19.53) 20.5,19.53 cw(c17.6,19.53)
Bottom Layer:
  pour cut-out: 39.068,95.071 38.004,94.007 38.004,80.816 39.221,79.599 42.48,79.599 43.521,80.64 43.521,94.092 42.542,95.071
  region net +5: 14.605,104.745 412.496,104.745 412.877,104.364 412.877,101.062 412.242,100.427 14.732,100.427 13.843,101.316 13.843,103.983
  region net GND: 14.732,99.665 412.242,99.665 412.877,99.03 412.877,95.982 412.369,95.474 14.605,95.474 13.843,96.236 13.843,98.776
  pour cut-out: 75.931,95.085 74.867,94.021 74.867,80.83 76.084,79.613 81.618,79.613 82.947,80.942 82.947,94.007 81.869,95.085
  pour cut-out: 75.931,77.305 74.867,76.241 74.867,63.05 76.084,61.833 81.618,61.833 82.947,63.162 82.947,76.227 81.869,77.305
  pour cut-out: 75.931,59.525 74.867,58.461 74.867,45.27 76.084,44.053 81.618,44.053 82.947,45.382 82.947,58.447 81.869,59.525
  pour cut-out: 75.931,41.745 74.867,40.681 74.867,31.178 75.976,30.069 81.299,30.069 82.947,31.717 82.947,40.667 81.869,41.745
  pour cut-out: 131.811,95.085 130.747,94.021 130.747,80.83 131.964,79.613 137.498,79.613 138.827,80.942 138.827,94.007 137.749,95.085
  pour cut-out: 162.291,95.085 161.227,94.021 161.227,80.83 162.444,79.613 167.978,79.613 169.307,80.942 169.307,94.007 168.229,95.085
  pour cut-out: 192.771,95.085 191.707,94.021 191.707,80.83 192.924,79.613 198.458,79.613 199.787,80.942 199.787,94.007 198.709,95.085
  pour cut-out: 223.251,95.085 222.187,94.021 222.187,80.83 223.404,79.613 228.938,79.613 230.267,80.942 230.267,94.007 229.189,95.085
  pour cut-out: 253.731,95.085 252.667,94.021 252.667,80.83 253.884,79.613 259.418,79.613 260.747,80.942 260.747,94.007 259.669,95.085
  pour cut-out: 284.211,95.085 283.147,94.021 283.147,80.83 284.364,79.613 289.898,79.613 291.227,80.942 291.227,94.007 290.149,95.085
  pour cut-out: 314.691,95.085 313.627,94.021 313.627,80.83 314.844,79.613 320.378,79.613 321.707,80.942 321.707,94.007 320.629,95.085
  pour cut-out: 345.171,95.085 344.107,94.021 344.107,80.83 345.324,79.613 350.858,79.613 352.187,80.942 352.187,94.007 351.109,95.085
  pour cut-out: 375.651,95.085 374.587,94.021 374.587,80.83 375.804,79.613 381.338,79.613 382.667,80.942 382.667,94.007 381.589,95.085
  pour cut-out: 406.131,95.085 405.067,94.021 405.067,80.83 406.284,79.613 411.818,79.613 413.147,80.942 413.147,94.007 412.069,95.085
  pour cut-out: 406.131,77.305 405.067,76.241 405.067,63.05 406.284,61.833 411.818,61.833 413.147,63.162 413.147,76.227 412.069,77.305
  pour cut-out: 375.651,77.305 374.587,76.241 374.587,63.05 375.804,61.833 381.338,61.833 382.667,63.162 382.667,76.227 381.589,77.305
  pour cut-out: 345.171,77.305 344.107,76.241 344.107,63.05 345.324,61.833 350.858,61.833 352.187,63.162 352.187,76.227 351.109,77.305
  pour cut-out: 314.691,77.305 313.627,76.241 313.627,63.05 314.844,61.833 320.378,61.833 321.707,63.162 321.707,76.227 320.629,77.305
  pour cut-out: 284.211,77.305 283.147,76.241 283.147,63.05 284.364,61.833 289.898,61.833 291.227,63.162 291.227,76.227 290.149,77.305
  pour cut-out: 253.731,77.305 252.667,76.241 252.667,63.05 253.884,61.833 259.418,61.833 260.747,63.162 260.747,76.227 259.669,77.305
  pour cut-out: 223.251,77.305 222.187,76.241 222.187,63.05 223.404,61.833 228.938,61.833 230.267,63.162 230.267,76.227 229.189,77.305
  pour cut-out: 192.771,77.305 191.707,76.241 191.707,63.05 192.924,61.833 198.458,61.833 199.787,63.162 199.787,76.227 198.709,77.305
  pour cut-out: 162.291,77.305 161.227,76.241 161.227,63.05 162.444,61.833 167.978,61.833 169.307,63.162 169.307,77.305
  pour cut-out: 131.811,77.305 130.747,76.241 130.747,63.05 131.964,61.833 137.498,61.833 138.827,63.162 138.827,76.227 137.749,77.305
  pour cut-out: 131.811,59.525 130.747,58.461 130.747,45.27 131.964,44.053 137.498,44.053 138.827,45.382 138.827,58.447 137.749,59.525
  pour cut-out: 131.811,41.745 130.747,40.681 130.747,27.49 131.964,26.273 137.498,26.273 138.827,27.602 138.827,40.667 137.749,41.745
  pour cut-out: 162.291,41.745 161.227,40.681 161.227,27.49 162.444,26.273 167.978,26.273 169.307,27.602 169.307,40.667 168.229,41.745
  pour cut-out: 162.291,59.525 161.227,58.461 161.227,45.27 162.444,44.053 167.978,44.053 169.307,45.382 169.307,58.447 168.229,59.525
  pour cut-out: 192.771,59.525 191.707,58.461 191.707,45.27 192.924,44.053 198.458,44.053 199.787,45.382 199.787,58.447 198.709,59.525
  pour cut-out: 192.771,41.745 191.707,40.681 191.707,27.49 192.924,26.273 198.458,26.273 199.787,27.602 199.787,40.667 198.709,41.745
  pour cut-out: 223.251,41.745 222.187,40.681 222.187,27.49 223.404,26.273 228.938,26.273 230.267,27.602 230.267,40.667 229.189,41.745
  pour cut-out: 223.251,59.525 222.187,58.461 222.187,45.27 223.404,44.053 228.938,44.053 230.267,45.382 230.267,58.447 229.189,59.525
  pour cut-out: 253.731,59.525 252.667,58.461 252.667,45.27 253.884,44.053 259.418,44.053 260.747,45.382 260.747,58.447 259.669,59.525
  pour cut-out: 253.731,41.745 252.667,40.681 252.667,27.49 253.884,26.273 259.418,26.273 260.747,27.602 260.747,40.667 259.669,41.745
  pour cut-out: 284.211,41.745 283.147,40.681 283.147,27.49 284.364,26.273 289.898,26.273 291.227,27.602 291.227,40.667 290.149,41.745
  pour cut-out: 284.211,59.525 283.147,58.461 283.147,45.27 284.364,44.053 289.898,44.053 291.227,45.382 291.227,58.447 290.149,59.525
  pour cut-out: 314.691,59.525 313.627,58.461 313.627,45.27 314.844,44.053 320.378,44.053 321.707,45.382 321.707,58.447 320.629,59.525
  pour cut-out: 314.691,41.745 313.627,40.681 313.627,27.49 314.844,26.273 320.378,26.273 321.707,27.602 321.707,40.667 320.629,41.745
  pour cut-out: 345.171,59.525 344.107,58.461 344.107,45.27 345.324,44.053 350.858,44.053 352.187,45.382 352.187,58.447 351.109,59.525
  pour cut-out: 345.171,41.745 344.107,40.681 344.107,27.49 345.324,26.273 350.858,26.273 352.187,27.602 352.187,40.667 351.109,41.745
  pour cut-out: 375.651,41.745 374.587,40.681 374.587,27.49 375.804,26.273 381.338,26.273 382.667,27.602 382.667,40.667 381.589,41.745
  pour cut-out: 375.651,59.525 374.587,58.461 374.587,45.27 375.804,44.053 381.338,44.053 382.667,45.382 382.667,58.447 381.589,59.525
  pour cut-out: 406.131,59.525 405.067,58.461 405.067,45.27 406.284,44.053 411.818,44.053 413.147,45.382 413.147,58.447 412.069,59.525
  pour cut-out: 406.131,41.745 405.067,40.681 405.067,27.49 406.284,26.273 411.818,26.273 413.147,27.602 413.147,40.667 412.069,41.745
  pour cut-out: 21.793,92.096 25.349,92.096 25.908,91.537 25.908,91.029 25.832,91.029 24.13,89.327 21.793,89.327
  pour cut-out: 17.6,16.63 cw(c17.6,19.53) 14.7,19.53 cw(c17.6,19.53) 17.6,22.43 cw(c17.6,19.53) 20.5,19.53 cw(c17.6,19.53)
  pour cut-out: 78.56,16.63 cw(c78.56,19.53) 75.66,19.53 cw(c78.56,19.53) 78.56,22.43 cw(c78.56,19.53) 81.46,19.53 cw(c78.56,19.53)

## Silkscreen, mask and mechanical layers (free items; w line width, h text height)
Top Overlay:
  lines w0.254: -25.273,64.5 464.287,64.5
  text "BTS4000_BackBoard_V1.0" at 26.543,23.973 h3.81
  text "WWW.BONZN.CN" at 26.543,19.401 h3.05
  text "20180419" at 26.416,15.591 h3.05

## Dimensions
0,0 to 0,129 on Drill Drawing
7.26,126 to 7.26,3 on Drill Drawing
52.98,3 to 7.26,3 on Drill Drawing
52.98,3 to 98.7,3 on Drill Drawing
98.7,3 to 144.42,3 on Drill Drawing
144.42,3 to 190.14,3 on Drill Drawing
190.14,3 to 235.86,3 on Drill Drawing
235.86,3 to 281.58,3 on Drill Drawing
281.58,3 to 327.3,3 on Drill Drawing
327.3,3 to 373.02,3 on Drill Drawing
373.02,3 to 418.74,3 on Drill Drawing
17.6,109.47 to 78.56,109.47 on Drill Drawing
78.56,109.47 to 134.44,109.47 on Drill Drawing
134.44,109.47 to 164.92,109.47 on Drill Drawing
256.36,109.47 to 225.88,109.47 on Drill Drawing
164.92,109.47 to 195.4,109.47 on Drill Drawing
195.4,109.47 to 225.88,109.47 on Drill Drawing
256.36,109.47 to 286.84,109.47 on Drill Drawing
286.84,109.47 to 317.32,109.47 on Drill Drawing
317.32,109.47 to 347.8,109.47 on Drill Drawing
347.8,109.47 to 378.28,109.47 on Drill Drawing
378.28,109.47 to 408.76,109.47 on Drill Drawing
408.76,109.47 to 426,129 on Drill Drawing
17.6,109.47 to 0,129 on Drill Drawing

## Text inside footprints (layer, text, board x,y; h text height)
X0: Bottom Overlay "20" at 40.005,79.472 h1.27 r90; Bottom Overlay "19" at 42.545,79.472 h1.27 r90; Bottom Overlay "1" at 42.545,106.396 h1.27 r90; Bottom Overlay "2" at 40.005,106.396 h1.27 r90
X1: Top Overlay "A" at 253.677,105.546 h1.07; Top Overlay "B" at 256.395,105.521 h1.07; Top Overlay "C" at 258.935,105.419 h1.07; Top Overlay "1" at 251.849,103.413 h1.07; Top Overlay "8" at 251.645,85.43 h1.07; Top Overlay "16" at 251.163,65.338 h1.07; Top Overlay "24" at 251.163,44.917 h1.07; Top Overlay "32" at 251.163,24.698 h1.07
X2: Top Overlay "A" at 284.157,105.546 h1.07; Top Overlay "B" at 286.875,105.521 h1.07; Top Overlay "C" at 289.415,105.419 h1.07; Top Overlay "1" at 282.329,103.413 h1.07; Top Overlay "8" at 282.125,85.43 h1.07; Top Overlay "16" at 281.643,65.338 h1.07; Top Overlay "24" at 281.643,44.917 h1.07; Top Overlay "32" at 281.643,24.698 h1.07
X3: Top Overlay "A" at 314.637,105.546 h1.07; Top Overlay "B" at 317.355,105.521 h1.07; Top Overlay "C" at 319.895,105.419 h1.07; Top Overlay "1" at 312.809,103.413 h1.07; Top Overlay "8" at 312.605,85.43 h1.07; Top Overlay "16" at 312.123,65.338 h1.07; Top Overlay "24" at 312.123,44.917 h1.07; Top Overlay "32" at 312.123,24.698 h1.07
X4: Top Overlay "A" at 345.117,105.546 h1.07; Top Overlay "B" at 347.835,105.521 h1.07; Top Overlay "C" at 350.375,105.419 h1.07; Top Overlay "1" at 343.289,103.413 h1.07; Top Overlay "8" at 343.085,85.43 h1.07; Top Overlay "16" at 342.603,65.338 h1.07; Top Overlay "24" at 342.603,44.917 h1.07; Top Overlay "32" at 342.603,24.698 h1.07
X5: Top Overlay "A" at 375.597,105.546 h1.07; Top Overlay "B" at 378.315,105.521 h1.07; Top Overlay "C" at 380.855,105.419 h1.07; Top Overlay "1" at 373.769,103.413 h1.07; Top Overlay "8" at 373.565,85.43 h1.07; Top Overlay "16" at 373.083,65.338 h1.07; Top Overlay "24" at 373.083,44.917 h1.07; Top Overlay "32" at 373.083,24.698 h1.07
X6: Top Overlay "A" at 406.077,105.546 h1.07; Top Overlay "B" at 408.795,105.521 h1.07; Top Overlay "C" at 411.335,105.419 h1.07; Top Overlay "1" at 404.249,103.413 h1.07; Top Overlay "8" at 404.045,85.43 h1.07; Top Overlay "16" at 403.563,65.338 h1.07; Top Overlay "24" at 403.563,44.917 h1.07; Top Overlay "32" at 403.563,24.698 h1.07
X7: Top Overlay "32" at 12.403,24.698 h1.07; Top Overlay "24" at 12.403,44.917 h1.07; Top Overlay "16" at 12.403,65.338 h1.07; Top Overlay "8" at 12.885,85.43 h1.07; Top Overlay "1" at 13.089,103.413 h1.07; Top Overlay "C" at 20.175,105.419 h1.07; Top Overlay "B" at 17.635,105.521 h1.07; Top Overlay "A" at 14.917,105.546 h1.07
X8: Top Overlay "A" at 75.877,105.546 h1.07; Top Overlay "B" at 78.595,105.521 h1.07; Top Overlay "C" at 81.135,105.419 h1.07; Top Overlay "1" at 74.049,103.413 h1.07; Top Overlay "8" at 73.845,85.43 h1.07; Top Overlay "16" at 73.363,65.338 h1.07; Top Overlay "24" at 73.363,44.917 h1.07; Top Overlay "32" at 73.363,24.698 h1.07
X9: Top Overlay "A" at 162.237,105.546 h1.07; Top Overlay "B" at 164.955,105.521 h1.07; Top Overlay "C" at 167.495,105.419 h1.07; Top Overlay "1" at 160.409,103.413 h1.07; Top Overlay "8" at 160.205,85.43 h1.07; Top Overlay "16" at 159.723,65.338 h1.07; Top Overlay "24" at 159.723,44.917 h1.07; Top Overlay "32" at 159.723,24.698 h1.07
X10: Top Overlay "A" at 131.757,105.546 h1.07; Top Overlay "B" at 134.475,105.521 h1.07; Top Overlay "C" at 137.015,105.419 h1.07; Top Overlay "1" at 129.929,103.413 h1.07; Top Overlay "8" at 129.725,85.43 h1.07; Top Overlay "16" at 129.243,65.338 h1.07; Top Overlay "24" at 129.243,44.917 h1.07; Top Overlay "32" at 129.243,24.698 h1.07
X11: Top Overlay "A" at 192.717,105.546 h1.07; Top Overlay "B" at 195.435,105.521 h1.07; Top Overlay "C" at 197.975,105.419 h1.07; Top Overlay "1" at 190.889,103.413 h1.07; Top Overlay "8" at 190.685,85.43 h1.07; Top Overlay "16" at 190.203,65.338 h1.07; Top Overlay "24" at 190.203,44.917 h1.07; Top Overlay "32" at 190.203,24.698 h1.07
X12: Top Overlay "32" at 220.683,24.698 h1.07; Top Overlay "24" at 220.683,44.917 h1.07; Top Overlay "16" at 220.683,65.338 h1.07; Top Overlay "8" at 221.165,85.43 h1.07; Top Overlay "1" at 221.369,103.413 h1.07; Top Overlay "C" at 228.455,105.419 h1.07; Top Overlay "B" at 225.915,105.521 h1.07; Top Overlay "A" at 223.197,105.546 h1.07